# Altium PCB lps_display_rev_g.PcbDoc (part 2 of 3)
Units mil, origin at the board's own origin, x right, y up, seen from the top; angles counter-clockwise.
Board outline 5360 x 2470 mil, 2 copper layers (Top Layer, Bottom Layer), stack 6.2 mil thick; 133 components, 82 nets, 460 pads, 128 vias.
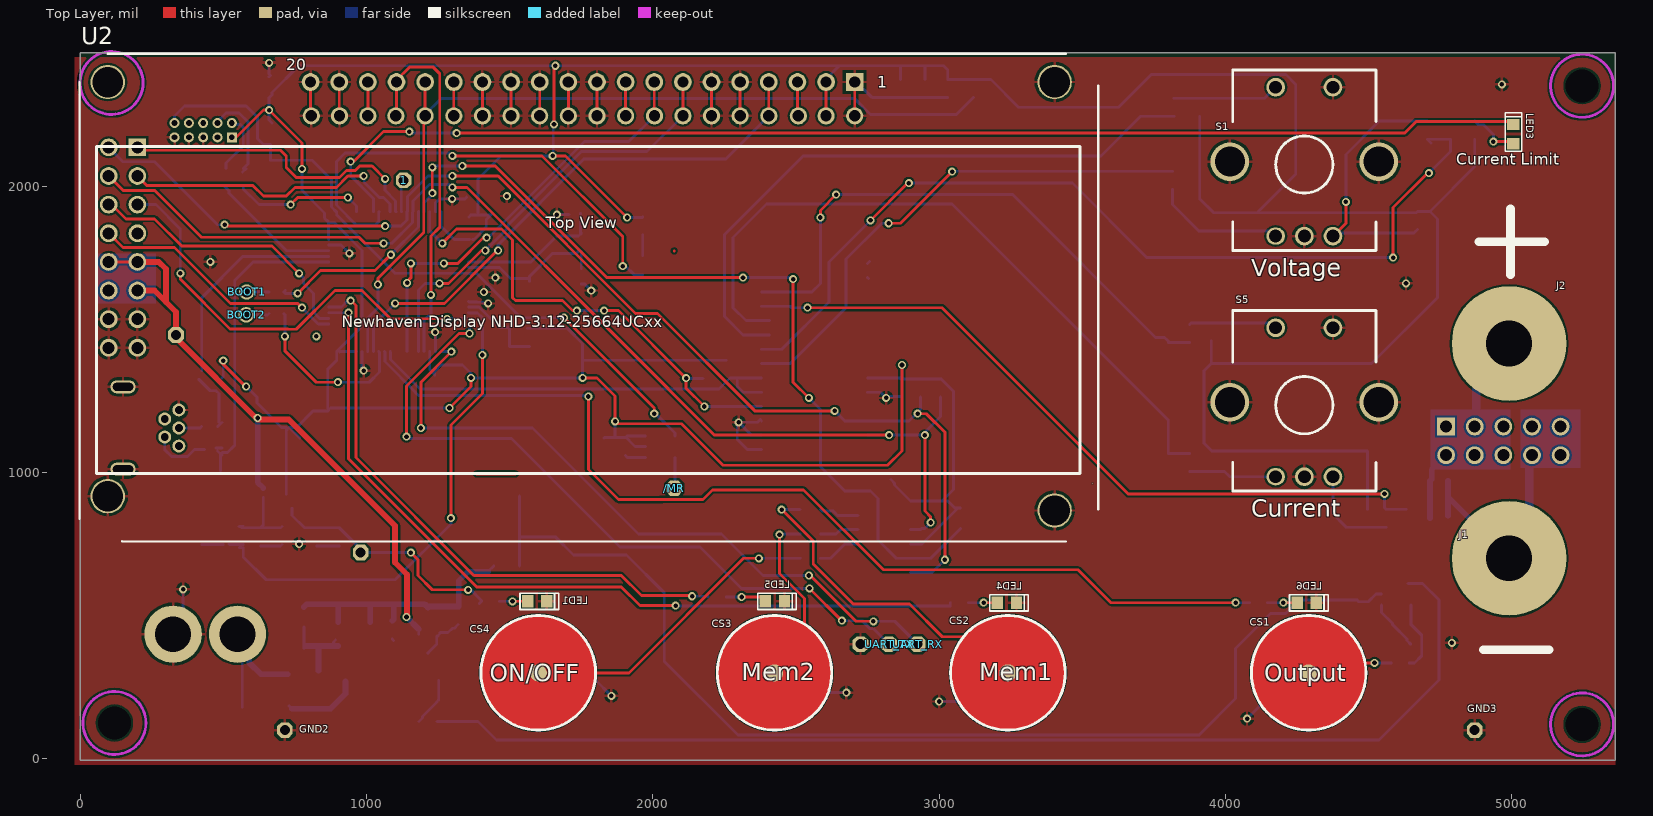
[diagram p0: Top Layer view]

## Part data (continued)
R18 R21: library part "RES 4.7K OHM 1/10W 5% 0603 SMD", "4.7K 0603", Manufacturer="Panasonic Electronic Components", Manufacturer Part Number=ERJ-3GEYJ472V, Package / Case=0603, Power (Watts)="0.1W, 1/10W", Resistance (Ohms)=1K, Supplier Part Number 1=P4.7KGCT-ND, Temperature Coefficient=±200ppm/°C, Tolerance=±5%, Category=Resistors, ComponentLink1Description=http://industrial.panasonic.com/www-cgi/jvcr13pz.cgi?E+PZ+3+AOA0001+ERJ3GEYJ472V+7+WW, ComponentLink1URL=http://industrial.panasonic.com/www-cgi/jvcr13pz.cgi?E+PZ+3+AOA0001+ERJ3GEYJ472V+7+WW, Composition="Thick Film", Features="Automotive AEC-Q200 Qualified", Height="0.022\" (0.55mm)", Number of Terminations=2, Packaging="Cut Tape (CT)", Pricing 1="1=0.1, 50=0.0126, 100=0.0096, 250=0.00716, 500=0.00528, 1000=0.00352, 2500=0.00297 (USD)", RoHS="RoHS Compliant", Size / Dimension="0.063\" L x 0.031\" W (1.60mm x 0.80mm)", Stock 1=1261582, Supplier 1=Digi-Key, Supplier Device Package=0603
R23: library part "RES 1K OHM 1% 1/10W 0603", "1.0K 0603", Manufacturer="Stackpole Electronics Inc.", Manufacturer Part Number=RMCF0603FT1K00, Operating Temperature="-55°C ~ 155°C", Package / Case=0603, Power (Watts)="0.1W, 1/10W", Resistance (Ohms)=9k, Supplier Part Number 1=RMCF0603FT1K00CT-ND, Temperature Coefficient=±100ppm/°C, Tolerance=±1%, Category=Resistors, ComponentLink1Description=https://www.seielect.com/Catalog/SEI-RMCF_RMCP.pdf, ComponentLink1URL=https://www.seielect.com/Catalog/SEI-RMCF_RMCP.pdf, Composition="Thick Film", Failure Rate=-, Features="Automotive AEC-Q200", Height - Seated (Max)="0.022\" (0.55mm)", Packaging="Cut Tape (CT)", Part Status=Active, Pricing 1="1=0.1, 10=0.02, 100=0.0081, 1000=0.00364, 2500=0.00316 (USD)", RoHS="RoHS Compliant", Size / Dimension="0.061\" L x 0.031\" W (1.55mm x 0.80mm)", Stock 1=411308, Supplier 1=Digi-Key, Supplier Device Package=0603
R25 R34: library part "RES 100K OHM 1% 1/10W 0603", "100K 0603", Manufacturer=Yageo, Manufacturer Part Number=RC0603FR-07100KL, Operating Temperature="-55°C ~ 155°C", Package / Case="0603 (1608 Metric)", Power (Watts)="0.1W, 1/10W", Supplier Device Package=0603, Supplier Part Number 1=311-100KHRCT-ND, Temperature Coefficient=±100ppm/°C, Tolerance=±1%, Category=Resistors, ComponentLink1Description=http://www.yageo.com/documents/recent/PYu-RC_Group_51_RoHS_L_8.pdf, ComponentLink1URL=http://www.yageo.com/documents/recent/PYu-RC_Group_51_RoHS_L_8.pdf, Composition="Thick Film", Failure Rate=-, Features="Moisture Resistant", Height - Seated (Max)="0.022\" (0.55mm)", Packaging="Cut Tape (CT)", Part Status=Active, Pricing 1="1=0.1, 10=0.015, 100=0.006, 1000=0.00268, 2500=0.00233 (USD)", RoHS="RoHS Compliant", Size / Dimension="0.063\" L x 0.032\" W (1.60mm x 0.80mm)", Stock 1=13526613, Supplier 1=Digi-Key
R26 R32: library part "RES 1K OHM 1% 1/10W 0603", "1.0K 0603", Manufacturer="Stackpole Electronics Inc.", Manufacturer Part Number=RMCF0603FT1K00, Operating Temperature="-55°C ~ 155°C", Package / Case=0603, Power (Watts)="0.1W, 1/10W", Resistance (Ohms)=330, Supplier Part Number 1=RMCF0603FT1K00CT-ND, Temperature Coefficient=±100ppm/°C, Tolerance=±1%, Category=Resistors, ComponentLink1Description=https://www.seielect.com/Catalog/SEI-RMCF_RMCP.pdf, ComponentLink1URL=https://www.seielect.com/Catalog/SEI-RMCF_RMCP.pdf, Composition="Thick Film", Failure Rate=-, Features="Automotive AEC-Q200", Height - Seated (Max)="0.022\" (0.55mm)", Packaging="Cut Tape (CT)", Part Status=Active, Pricing 1="1=0.1, 10=0.02, 100=0.0081, 1000=0.00364, 2500=0.00316 (USD)", RoHS="RoHS Compliant", Size / Dimension="0.061\" L x 0.031\" W (1.55mm x 0.80mm)", Stock 1=411308, Supplier 1=Digi-Key, Supplier Device Package=0603
R29 R30: library part "RES 100 OHM 1% 1/10W 0603 2017", "100 0603", Manufacturer="Vishay Dale", Manufacturer Part Number=CRCW0603100RFKEC, Operating Temperature="-55°C ~ 155°C", Package / Case=0603, Power (Watts)="0.1W, 1/10W", Supplier Part Number 1=541-2975-1-ND, Temperature Coefficient=±100ppm/°C, Tolerance=±1%, Category=Resistors, ComponentLink1Description=http://www.vishay.com/docs/20035/dcrcwe3.pdf, ComponentLink1URL=http://www.vishay.com/docs/20035/dcrcwe3.pdf, Composition="Thick Film", Failure Rate=-, Features="Automotive AEC-Q200", Height - Seated (Max)="0.020\" (0.50mm)", Packaging="Cut Tape (CT)", Part Status=Active, Pricing 1="1=0.1, 10=0.033, 100=0.0136, 1000=0.00609, 2500=0.00529, 5000=0.00437 (USD)", Resistance (Ohms)=100, RoHS="RoHS Compliant", Size / Dimension="0.063\" L x 0.033\" W (1.60mm x 0.85mm)", Stock 1=25979, Supplier 1=Digi-Key, Supplier Device Package=0603
R31: library part "RES 10K OHM 1/10W 1% 0603 SMD", "10K 0603", Manufacturer="Panasonic Electronic Components", Manufacturer Part Number=ERJ-3EKF1002V, Package / Case=0603, Power (Watts)="0.1W, 1/10W", Resistance (Ohms)=20k, Supplier Part Number 1=P10.0KHCT-ND, Temperature Coefficient=±100ppm/°C, Tolerance=±1%, Category=Resistors, ComponentLink1Description=http://industrial.panasonic.com/www-cgi/jvcr13pz.cgi?E+PZ+3+AOA0002+ERJ3EKF1002V+7+WW, ComponentLink1URL=http://industrial.panasonic.com/www-cgi/jvcr13pz.cgi?E+PZ+3+AOA0002+ERJ3EKF1002V+7+WW, Composition="Thick Film", Features=-, Height="0.022\" (0.55mm)", Number of Terminations=2, Packaging="Cut Tape (CT)", Pricing 1="1=0.1, 50=0.015, 100=0.0114, 250=0.00844, 500=0.00624, 1000=0.00416, 2500=0.00351 (USD)", RoHS="RoHS Compliant", Size / Dimension="0.063\" L x 0.031\" W (1.60mm x 0.80mm)", Stock 1=5046430, Supplier 1=Digi-Key, Supplier Device Package=0603